# Allegro board GSD_Costea_Corina.brd
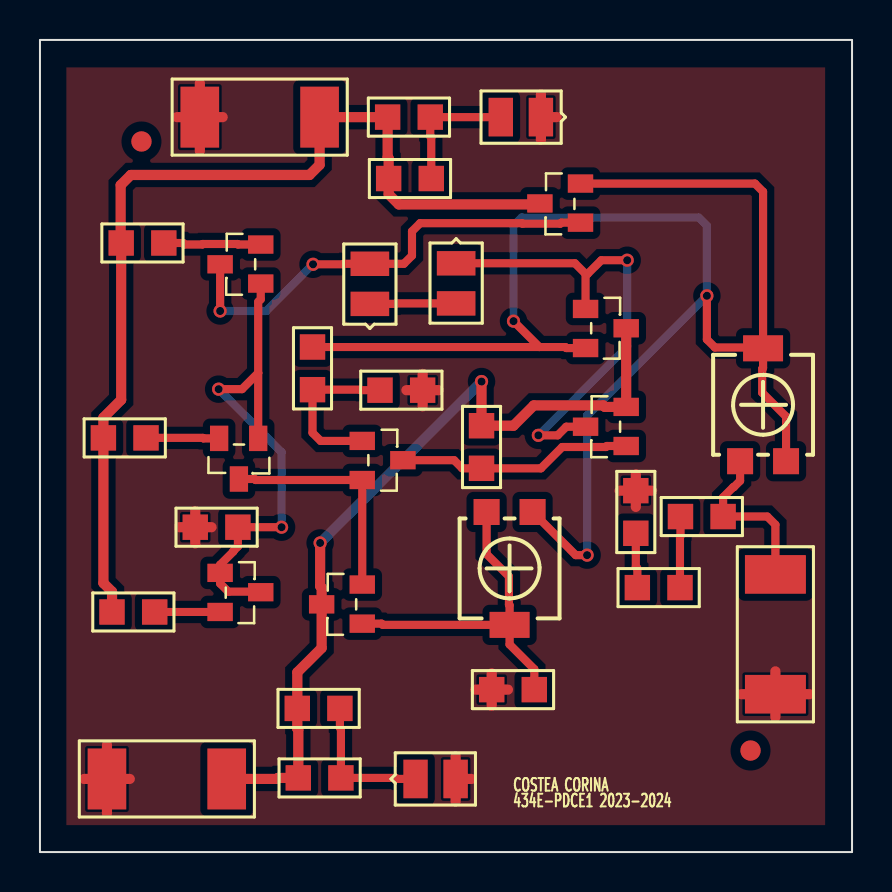
[diagram p0: board, top side]
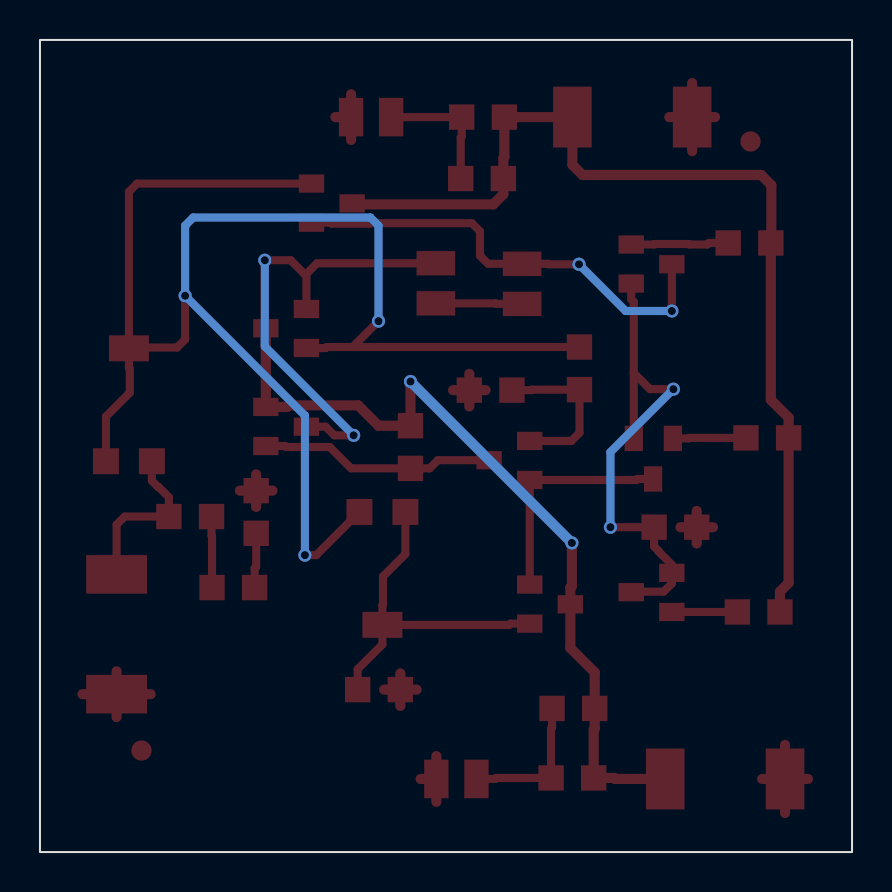
[diagram p1: board, bottom side, seen from below]

Outline 40.64 x 40.64 mm; copper layers: TOP, BOTTOM. Coordinates in mm from the lower left corner of the outline.
Outline path: rectangle 0,0 40.64,40.64

## Design rules (mm)
nets with their own width: min track width 0.406; nets N226477 N226607 N226613 N226687 N226783 N226825 N226913 N226919 N226927 N227011 N227115 N227187 N227417 N227443 N227471 N227507 N2270411
nets with their own width: min track width 0.508; nets GND VCC VEE

## Placement (name value [footprint] x y rotation side)
C1  100n  [SMC0805]  22.61 8.13 0 top
D4  LED  [SMD0805]  18.8 3.66 0 top
D5  LED  [SMD0805]  25.07 36.78 180 top
JCC  CON2  [SMR2512]  8 36.78 0 top
JEE  CON2  [SMR2512]  9.35 3.66 180 top
JOUT  CON2  [SMR2512]  36.8 13.89 270 top
NOREF  -  []  0 0 90 top
NOREF#2  -  [unnamed#2]  5.08 35.56 0 top
NOREF#3  -  [unnamed#2]  35.56 5.08 0 top
NOREF#4  -  []  0 40.64 0 top
POT1  10k  [TS53YL]  22.35 17.02 90 top
POT2  500k  [TS53YL]  37.34 19.56 270 top
Q1  QBC807-25  [TO236]  9.14 13.97 180 top
Q2  QBC807-25  [TO236]  10.92 20.57 90 top
Q3  QBC807-25  [TO236]  10.92 28.45 0 top
Q4  QBC807-25  [TO236]  16.26 20.57 180 top
Q5  QBC807-25  [TO236]  16 11.43 0 top
Q6  QBC817-25  [TO236]  29.21 20.32 0 top
Q7  QBC807-25  [TO236]  27.43 27.18 180 top
Q8  QBC817-25  [TO236]  26.92 31.5 0 top
R1  6.8k  [SMR0805]  9.91 16.26 180 top
R2  100  [SMR0805]  4.06 30.48 0 top
R3  1k  [SMR0805]  17.02 23.11 0 top
R4  1k  [SMR0805]  13.64 23.14 90 top
R5  100  [SMR0805]  5.74 12.01 180 top
R6  100  [SMR0805]  5.31 20.73 180 top
R7  1.5k  [SMR0805]  22.1 21.34 270 top
R8  1k  [SMR0805]  17.4 36.78 0 top
R9  1k  [SMR0805]  17.45 33.71 0 top
R10  1k  [SMR0805]  12.93 3.71 0 top
R11  1k  [SMR0805]  12.88 7.19 0 top
RL1  3.3k  [SMR0805]  32.05 16.79 0 top
RL2  2.7k  [SMR0805]  29.9 13.23 0 top
RL3  1k  [SMR0805]  29.82 18.08 270 top
U2  1N4148  [SMD0805]  16.51 27.43 90 top
U3  1N4148  [SMD0805]  20.83 29.46 270 top

## Library data of the parts
C1 = C
D4 D5 = LED_0
JCC JEE JOUT = CON2
POT1 POT2 = POT
Q1-Q5 Q7 = QBC807-25_0
Q6 Q8 = QBC817-25_0
R1-R11 RL1-RL3 = R
U2 U3 = 1N4148_0

## Footprints (pads in the part's own frame, mm; a bottom-side part is the same pattern mirrored in y, then rotated)
SMC0805
  rect 1.27x1.27 smd: 1(0,0) 2(2.134,0)
SMD0805
  rect 1.219x1.93 smd: A(2.007,0) C(0,0)
SMR0805
  rect 1.27x1.27 smd: 1(0,0) 2(2.134,0)
SMR2512
  rect 1.93x3.048 smd: 1(0,0) 2(5.994,0)
TO236
  rect 1.27x0.914 smd: 1(0.127,0) 2(0.127,1.956) 3(-1.905,0.965)
TS53YL
  rect 1.3x1.3 smd: 1(0,0) 3(0,-2.3)
  rect 1.3x2 smd: 2(-5.65,-1.15)
unnamed#2
  round 1.016 smd: (0,0)

## Nets
GND: C1.1 D4.A D5.C(CATHODE) JCC.1 JEE.2 JOUT.2 R1.2 R3.2 RL3.1
VCC: JCC.2 Q8.3 R2.1 R5.2 R6.2 R8.1 R9.1
VEE: JEE.1 Q5.3 Q6.2(E) Q7.3 R7.1 R10.1 R11.1
N226477: POT1.3 POT2.1 POT2.2(T) Q7.2(E) Q8.2(E) R4.2
N226607: Q3.3 Q8.1 U2.A
N226613: Q6.3 Q7.1 U3.C(2)
N226687: JOUT.1 POT2.3 RL1.2
N226783: Q3.2(E) R2.2
N226825: U2.C(2) U3.A
N226913: Q1.1 Q1.3 Q2.1 Q3.1 R1.1
N226919: C1.2 POT1.1 POT1.2(T) Q5.1
N226927: Q4.3 Q6.1 R7.2
N227011: RL1.1 RL2.2
N227115: Q2.3 Q4.2(E) Q5.2(E)
N227187: Q2.2(E) R6.1
N227417: Q4.1 R3.1 R4.1
N227443: D5.A R8.2 R9.2
N227471: Q1.2(E) R5.1
N227507: D4.C(CATHODE) R10.2 R11.2
N2270411: RL2.1 RL3.2

## Via types
v1: diameter 0.66, hole 0.406, TOP to BOTTOM, 11 vias

## Routing (per net, layer and track width the routed paths; a pad name or vN(x,y) marks a point on that pad's centre or on a via; arc(x,y) is an arc through that point)
GND: length 36.2
  TOP w0.508: 29.01,18.08 RL3.1 ; RL3.1 29.82,18.9 ; RL3.1 30.63,18.08 ; RL3.1 29.82,17.27 ; D4.A 20.8,4.8 ; D4.A 21.59,3.66 ; D4.A 20.8,2.51 ; 35.1,7.9 JOUT.2 ; JOUT.2 36.8,9.04 ; JOUT.2 38.51,7.9 ; JOUT.2 36.8,6.76 ; 21.79,8.13 C1.1 ; C1.1 22.61,7.31 ; C1.1 22.61,8.94 ; C1.1 23.42,8.13 ; 7.77,15.44 R1.2 ; R1.2 8.59,16.26 ; R1.2 7.77,17.07 ; R1.2 6.96,16.26 ; 6.86,36.78 JCC.1 ; JCC.1 8,38.48 ; JCC.1 8,35.08 ; JCC.1 9.14,36.78 ; 3.35,1.96 JEE.2 ; JEE.2 4.5,3.66 ; JEE.2 3.35,5.36 ; JEE.2 2.21,3.66 ; 19.15,22.3 R3.2 ; R3.2 19.96,23.11 ; R3.2 19.15,23.93 ; R3.2 18.34,23.11 ; D5.C 25.86,36.78 ; D5.C 25.07,35.64 ; D5.C 25.07,37.92
VCC: length 49.8
  TOP w0.508: R5.2 3.61,13.03 3.17,13.46 R6.2 3.17,21.74 4.06,22.63 R2.1 4.04,30.51 4.04,33.38 4.55,33.88 13.49,33.88 14,34.39 JCC.2 R8.1 17.4,34.77 17.45,34.72 R9.1 17.45,32.92 17.96,32.41 24.97,32.41 Q8.3
VEE: length 41.2
  TOP w0.508: Q7.3 Q6.2 28.27,22.28 28.19,22.35 24.71,22.35 23.7,21.34 R7.1 v1(22.1,23.55) ; JEE.1 11.86,3.66 11.91,3.71 R10.1 12.93,6.12 12.88,6.17 R11.1 12.88,8.99 14.1,10.21 Q5.3 14.1,13.23 14.02,13.31 v1(14.02,15.47)
  BOTTOM w0.508: v1(22.1,23.55) v1(14.02,15.47)
N226477: length 81.4
  TOP w0.406: R4.2 24.99,25.27 ; 24.99,25.27 26.29,25.27 26.34,25.22 Q7.2 ; 24.99,25.27 v1(23.7,26.57) ; v1(33.38,27.84) 33.38,25.65 33.78,25.25 36.15,25.25 POT2.2 ; Q8.2 35.78,33.45 36.19,33.05 POT2.2 ; POT2.1 37.34,21.79 36.14,22.99 36.14,24.18 36.19,24.23 POT2.2 ; v1(27.38,14.86) 26.81,14.86 POT1.3
  BOTTOM w0.406: v1(27.38,14.86) 27.38,21.84 v1(33.38,27.84) 33.38,31.35 32.97,31.75 24.1,31.75 23.7,31.35 v1(23.7,26.57)
N226607: length 22.9
  TOP w0.406: 9.02,29.41 v1(9.02,27.08) ; Q8.1 26.09,31.5 26.04,31.45 24.15,31.45 24.13,31.47 19.02,31.47 18.62,31.06 18.62,29.84 18.21,29.44 U2.A 15.21,29.44 15.19,29.41 v1(13.67,29.41)
  BOTTOM w0.406: v1(13.67,29.41) 11.33,27.08 v1(9.02,27.08)
N226613: length 24
  TOP w0.406: 27.3,28.93 26.77,29.46 U3.C ; 27.3,28.93 27.41,28.93 28.09,29.62 v1(29.39,29.62) ; 27.3,28.93 Q7.1 ; v1(24.94,20.85) 25.91,20.85 26.34,21.29 Q6.3
  BOTTOM w0.406: v1(24.94,20.85) 29.39,25.3 v1(29.39,29.62)
N226687: length 8.4
  TOP w0.406: POT2.3 35.04,18.58 34.72,18.26 34.7,18.26 34.19,17.75 RL1.2 36.4,16.79 36.8,16.38 JOUT.1
N226783: length 4.9
  TOP w0.406: 11.05,30.4 9.91,30.4 9.88,30.43 8.15,30.43 8.12,30.4 7.24,30.4 7.16,30.48 R2.2
N226825: length 4.3
  TOP w0.406: U2.C 17.81,27.43 17.83,27.46 U3.A
N226913: length 25.9
  TOP w0.406: v1(12.09,16.26) R1.1 9.91,15.29 9.68,15.06 9.68,15.04 9.02,14.38 Q1.1 9.02,13.44 9.42,13.03 11.02,13.03 Q1.3 ; Q2.1 10.92,23.98 ; 10.92,23.98 10.11,23.16 v1(8.94,23.16) ; 10.92,23.98 10.92,27.53 11.05,27.66 11.05,28.45
  BOTTOM w0.406: v1(12.09,16.26) 12.09,20.02 v1(8.94,23.16)
N226919: length 17.3
  TOP w0.406: POT1.2 17.16,11.37 17.09,11.43 16.13,11.43 ; POT1.2 23.5,10.39 24.74,9.15 C1.2 ; POT1.2 23.5,12.35 23.47,12.38 23.47,13.79 22.35,14.91 POT1.1
N226927: length 11.8
  TOP w0.406: Q6.1 28.37,20.32 28.32,20.27 26.14,20.27 25.07,19.2 R7.2 21.13,19.2 20.73,19.61 Q4.3
N227011: length 3.6
  TOP w0.406: RL1.1 32.05,15.82 32.03,15.8 RL2.2
N227115: length 11.4
  TOP w0.406: Q2.3 10.74,18.67 10.79,18.62 Q4.2 16.13,13.39
N227187: length 3.7
  TOP w0.406: Q2.2 8.18,20.7 8.15,20.73 R6.1
N227417: length 8.2
  TOP w0.406: R3.1 16.05,23.11 16.03,23.14 R4.1 13.64,20.98 14.05,20.57 Q4.1
N227443: length 6.6
  TOP w0.406: D5.A R8.2 19.53,35.81 19.58,35.76 R9.2
N227471: length 3.3
  TOP w0.406: Q1.2 R5.1
N227507: length 7.3
  TOP w0.406: D4.C 17.86,3.66 17.81,3.71 R10.2 15.06,6.17 15.01,6.22 R11.2
N2270411: length 2.7
  TOP w0.406: RL3.2 29.82,14.27 29.9,14.2 RL2.1

## Copper pours and planes (outline as drawn; the poured copper is in the pictures)
GND on TOP: 1.32,39.27 1.32,1.35 39.29,1.35 39.29,39.27

## Text on the board
Ref Des/Silkscreen Top: COSTEA CORINA | 434E-PDCE1 2023-2024
XSECTION_CHART: *  SURFACE - AIR 0 MIL | L1 TOP CONDUCTOR - COPPER 1.4 MIL | *  DIELECTRIC - FR-4 61.2 MIL | L2 BOTTOM CONDUCTOR - COPPER 1.4 MIL | DESIGN CROSS SECTION CHART | ___________________________ | TOTAL THICKNESS 64 MIL | 1-2
DIMENSION: FIGURE | FINISHED_SIZE | 16.0 | DRILL CHART: TOP to BOTTOM | ALL UNITS ARE IN MILS | PLATED | QTY | 11
